# Altium PCB SLW_2018_V1.PcbDoc
Units mil, origin at the board's own origin, x right, y up, seen from the top; angles counter-clockwise.
Board outline 6000 x 4000 mil, 2 copper layers (Top Layer, Bottom Layer); 136 components, 146 nets, 765 pads, 0 vias.
Unrouted connection lines stored in the file: 452.
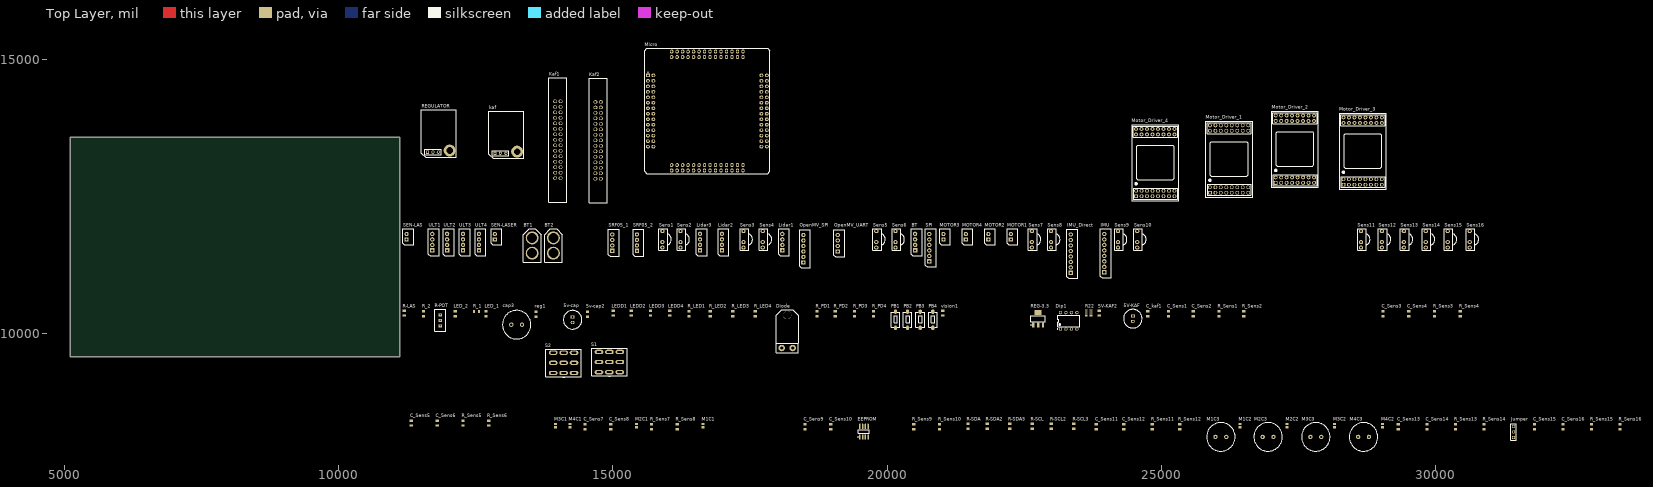
[diagram p0: Top Layer view]
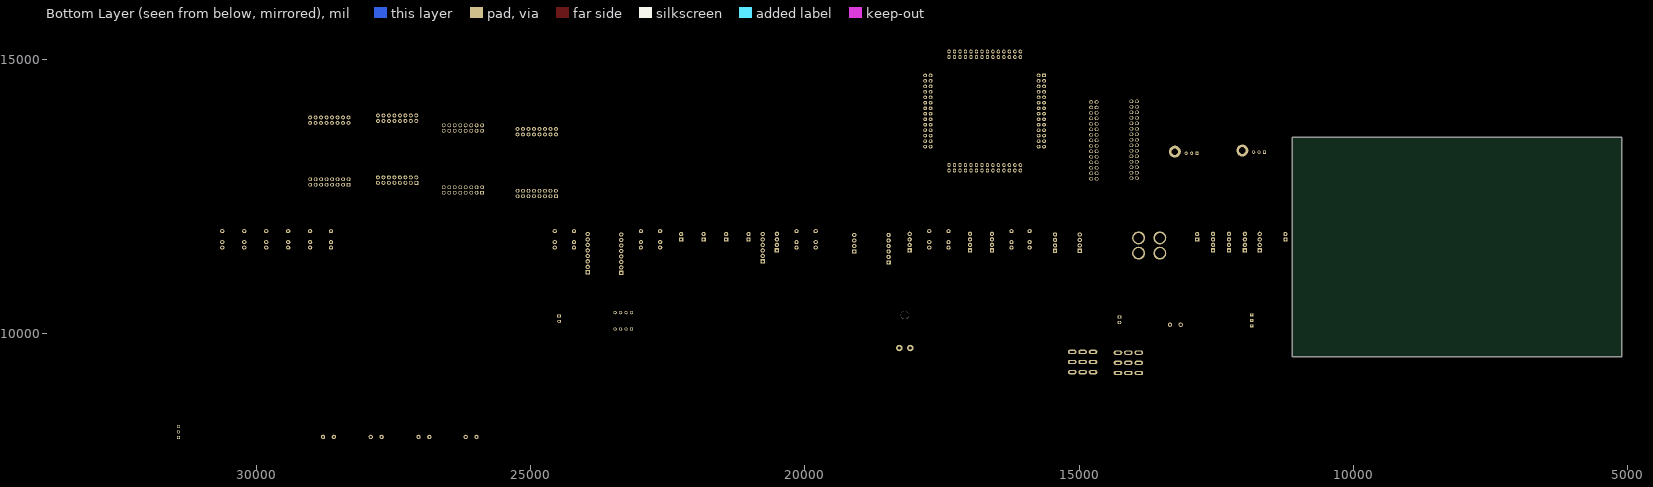
[diagram p1: Bottom Layer view, seen from below]

## Layer stack, top to bottom
Top Solder: solder mask 0.4, Solder Resist, Dk 3.5
Top Layer: signal copper 1.4
Dielectric 1: dielectric 12.6, FR-4, Dk 4.8
Bottom Layer: signal copper 1.4
Bottom Solder: solder mask 0.4, Solder Resist, Dk 3.5

## Board outline
5115,9575 11115,9575 11115,13575 5115,13575

## Design rules (kind name [scope] priority, off if disabled: settings)
Clearance [All] p1: gap=10
PolygonConnect [All] p1: connectstyle=Relief reliefconductorwidth=10 reliefentries=4 polygonreliefangle="90 Angle" airgapwidth=10
RoutingVias [All] p1: holewidth=28 width=50 viastyle="Through Hole" minholewidth=28 minwidth=50 maxholewidth=28 maxwidth=50
SolderMaskExpansion [All] p1: expansion=4
Width [All] p1: maxlimit=10 minlimit=10 preferedwidth=10
30 further rules are at their usual default settings.

## Components (designator, comment, footprint, x,y, rotation, side; value= is the part's Value field where it differs from the comment)
5v-cap "Cap" c100_63v 14270,10250 r0 top
5v-cap2 "Cap Semi" 805 14540,10350 r90 top
5V-KAF "Cap" c100_63v 24480,10270 r0 top
5V-KAF2 "Cap Semi" 805 23870,10370 r90 top
BT "Header 4" Round4 20540,11680 r90 top
BT1 "Battery" XT60 13695,11295 r90 top
BT2 "Battery" XT60 14080,11295 r90 top
C_kaf1 "Cap Semi" 805 24750,10360 r90 top
C_Sens1 "10uf" 805 25130,10360 r90 top
C_Sens2 "10uf" 805 25580,10360 r90 top
C_Sens3 "10uf" 805 29040,10360 r90 top
C_Sens4 "10uf" 805 29510,10360 r90 top
C_Sens5 "10uf" 805 11330,8365 r90 top
C_Sens6 "10uf" 805 11800,8365 r90 top
C_Sens7 "10uf" 805 14495,8295 r90 top
C_Sens8 "10uf" 805 14965,8295 r90 top
C_Sens9 "10uf" 805 18505,8295 r90 top
C_Sens10 "10uf" 805 18975,8295 r90 top
C_Sens11 "10uf" 805 23815,8295 r90 top
C_Sens12 "10uf" 805 24315,8295 r90 top
C_Sens13 "10uf" 805 29320,8295 r90 top
C_Sens14 "10uf" 805 29840,8295 r90 top
C_Sens15 "10uf" 805 31800,8295 r90 top
C_Sens16 "10uf" 805 32320,8295 r90 top
cap3 "Cap" C1000uf50v 13250,10160 r0 top
Diode "Diode 1N4007" STTA806 18180,10035 r0 top
Dip1 "dip switch 4" DIPsw4 23310,10230 r0 top
EEPROM "AT24C01BN-SP25-B" 8S1_M 19580,8210 r90 top
IMU "Header 8" Round8 23960,11115 r90 top
IMU_Direct "Header 8" Round8 23350,11105 r90 top
Jumper "Header 3" HDR1X3 31420,8105 r90 top
kaf "Header 3" LM2576 13055,13300 r0 top
Kaf1 "Header 15X2" PHL2X15 14000,13530 r90 top
Kaf2 "Header 15X2" PHL2X15 14735,13520 r90 top
LED_1 "LED Green 0603" 805 12690,10360 r90 top
LED_2 "LED Green 0805" 805 12130,10360 r90 top
LEDD1 "LED Green 0603" 805 15010,10370 r90 top
LEDD2 "LED Green 0603" 805 15340,10370 r90 top
LEDD3 "LED Green 0603" 805 15690,10370 r90 top
LEDD4 "LED Green 0603" 805 16040,10370 r90 top
Lidar1 "Header 4" Round4 18120,11680 r90 top
Lidar2 "Header 4" Round4 17020,11680 r90 top
Lidar3 "Header 4" Round4 16620,11680 r90 top
M1C1 "Cap Semi" C0805 16645,8320 r90 top
M1C2 "Cap Semi" C0805 26435,8320 r90 top
M1C3 "Cap Semi" C1000uf50v 26085,8115 r0 top
M2C1 "Cap Semi" C0805 15435,8320 r90 top
M2C2 "Cap Semi" C0805 27290,8320 r90 top
M2C3 "Cap Semi" C1000uf50v 26945,8115 r0 top
M3C1 "Cap Semi" C0805 13955,8320 r90 top
M3C2 "Cap Semi" C0805 28160,8320 r90 top
M3C3 "Cap Semi" C1000uf50v 27815,8115 r0 top
M4C1 "Cap Semi" C0805 14225,8320 r90 top
M4C2 "Cap Semi" C0805 29030,8320 r90 top
M4C3 "Cap Semi" C1000uf50v 28685,8115 r0 top
Micro "DB" DBPCB 16725,14055 r0 top
MOTOR1 "Motor" Round2 22355,11615 r90 top
MOTOR2 "Motor" Round2 21945,11615 r90 top
MOTOR3 "Motor" Round2 21125,11615 r90 top
MOTOR4 "Motor" Round2 21535,11615 r90 top
Motor_Driver_1 "Driver" Driver 26235,13180 r90 top
Motor_Driver_2 "Driver" Driver 27435,13360 r90 top
Motor_Driver_3 "Driver" Driver 28670,13325 r90 top
Motor_Driver_4 "Driver" Driver 24890,13115 r90 top
OpenMV_SPI "Header 6" Round6 18475,11295 r90 top
OpenMV_UART "Header 4" Round4 19130,11660 r90 top
PB1 "SW-PB" TactSMD 20155,10250 r90 top
PB2 "SW-PB" TactSMD 20375,10250 r90 top
PB3 "SW-PB" TactSMD 20605,10250 r90 top
PB4 "SW-PB" TactSMD 20835,10250 r90 top
R22 "10K" Res_Array 23675,10375 r0 top
R-LAS "Res1" 805 11200,10370 r90 top
R-POT "RPot" Multiturn 11855,10240 r90 top
R-SCL "Res1" 805 22645,8305 r90 top
R-SCL2 "Res1" 805 22995,8305 r90 top
R-SCL3 "Res1" 805 23405,8305 r90 top
R-SDA "Res1" 805 21475,8305 r90 top
R-SDA2 "Res1" 805 21825,8305 r90 top
R-SDA3 "Res1" 805 22235,8305 r90 top
R_1 "1K" 805 12515,10400 r0 top
R_2 "10K" 805 11550,10360 r90 top
R_LED1 "680 603" 805 16390,10360 r90 top
R_LED2 "680 603" 805 16780,10360 r90 top
R_LED3 "680 603" 805 17190,10360 r90 top
R_LED4 "680 603" 805 17600,10360 r90 top
R_PD1 "10K 603" 805 18725,10360 r90 top
R_PD2 "10K 603" 805 19055,10360 r90 top
R_PD3 "10K 603" 805 19405,10360 r90 top
R_PD4 "10K 603" 805 19755,10360 r90 top
R_Sens1 "100" 805 26050,10360 r90 top
R_Sens2 "100" 805 26500,10360 r90 top
R_Sens3 "100" 805 29980,10360 r90 top
R_Sens4 "100" 805 30450,10360 r90 top
R_Sens5 "100" 805 12270,8365 r90 top
R_Sens6 "100" 805 12740,8365 r90 top
R_Sens7 "100" 805 15705,8295 r90 top
R_Sens8 "100" 805 16175,8295 r90 top
R_Sens9 "100" 805 20485,8295 r90 top
R_Sens10 "100" 805 20955,8295 r90 top
R_Sens11 "100" 805 24835,8295 r90 top
R_Sens12 "100" 805 25335,8295 r90 top
R_Sens13 "100" 805 30360,8295 r90 top
R_Sens14 "100" 805 30880,8295 r90 top
R_Sens15 "100" 805 32840,8295 r90 top
R_Sens16 "100" 805 33360,8295 r90 top
reg1 "Cap" 805 13600,10350 r90 top
REG-3.3 "LM1117IMP-3.3" MP04A_N 22755,10270 r90 top
REGULATOR "Header 3" LM2576 11825,13320 r0 top
S1 "Toggle_Switch_3PDT" TS_3dpt 14940,9480 r180 top
S2 "Toggle_Switch_3PDT" TS_3dpt 14105,9465 r180 top
SEN-LAS "Header 2" Round2 11340,11615 r90 top
SEN-LASER "Header 2" Round2 12950,11615 r90 top
Sens1 "Header 3" TSOP 15905,11715 r90 top
Sens2 "Header 3" TSOP 16235,11715 r90 top
Sens3 "Header 3" TSOP 17385,11715 r90 top
Sens4 "Header 3" TSOP 17735,11715 r90 top
Sens5 "Header 3" TSOP 19805,11715 r90 top
Sens6 "Header 3" TSOP 20155,11715 r90 top
Sens7 "Header 3" TSOP 22640,11715 r90 top
Sens8 "Header 3" TSOP 22990,11715 r90 top
Sens9 "Header 3" TSOP 24210,11715 r90 top
Sens10 "Header 3" TSOP 24560,11715 r90 top
Sens11 "Header 3" TSOP 28640,11715 r90 top
Sens12 "Header 3" TSOP 29020,11715 r90 top
Sens13 "Header 3" TSOP 29420,11715 r90 top
Sens14 "Header 3" TSOP 29820,11715 r90 top
Sens15 "Header 3" TSOP 30220,11715 r90 top
Sens16 "Header 3" TSOP 30620,11715 r90 top
SPI "Header 6" Round6 20770,11315 r90 top
SRF05_1 "Header 4" Round4 15020,11670 r90 top
SRF05_2 "Header 4" Round4 15470,11670 r90 top
ULT1 "Header 4" Round4 11740,11680 r90 top
ULT2 "Header 4" Round4 12010,11680 r90 top
ULT3 "Header 4" Round4 12300,11680 r90 top
ULT4 "Header 4" Round4 12590,11680 r90 top
vision1 "Cap Semi" 805 21015,10370 r90 top

## Footprints (in the part's own frame and the unit in brackets; to place one, negate y for a bottom-side part, rotate by r counter-clockwise, add the part's x,y. Pads: shape width x height; smd on the part's side, far side on the other; paste and mask are expansions set on the pad)
8S1_M [mm] "SOIC, 8-Leads, Body 4.9x3.9mm, Pitch 1.27mm, IPC Low Density"
  oval 2.5x0.7 smd: 1(-2.45,1.905) 2(-2.45,0.635) 3(-2.45,-0.635) 4(-2.45,-1.905) 5(2.45,-1.905) 6(2.45,-0.635) 7(2.45,0.635) 8(2.45,1.905)
  silkscreen extent -2.57,-2.55 0.8,2.93, body extent -1.99,-2.52 1.99,2.52, height 1.75
805 [mm]
  rect 1.1x1.5 smd: 1(1.2,0) 2(-1.1,0)
  body extent -1,-0.7 1,0.7, height 0.6
c100_63v [mm]
  rect 1.824x1.5 hole 0.9: 1(0.016,1.27)
  oval 1.824x1.5 hole 0.9: 2(-0.016,-1.27)
  silkscreen extent -4.31,-4.3 4.28,4.3, body extent -4.3,-4.3 4.27,4.28, height 12.8
C0805 [mm] "Chip Capacitor, Body 2.0x1.3mm, IPC High Density"
  rect 1.1x1.4 smd: 1(-0.75,0) 2(0.75,0)
  body extent -1.1,-0.72 1.1,0.72, height 1.4
C1000uf50v [mm]
  round 2 hole 1: 1(-2.5,0) 2(2.5,0)
  silkscreen extent -6.6,-6.6 6.6,6.6, body extent -6.25,-6.25 6.25,6.25, height 25.5
DBPCB [mm]
  rect 1.8x1.524 hole 0.9: 1(-27.54,16.51)
  oval 1.8x1.524 hole 0.9: 2(-25,16.51) 3(-27.54,13.97) 4(-25,13.97) 5(-27.54,11.43) 6(-25,11.43) 7(-27.54,8.89) 8(-25,8.89) 9(-27.54,6.35) 10(-25,6.35) 11(-27.54,3.81) 12(-25,3.81) 13(-27.54,1.27) 14(-25,1.27) 15(-27.54,-1.27) 16(-25,-1.27) 17(-27.54,-3.81) 18(-25,-3.81) 19(-27.54,-6.35) 20(-25,-6.35) 21(-27.54,-8.89) 22(-25,-8.89) 23(-27.54,-11.43) 24(-25,-11.43) 25(-27.54,-13.97) 26(-25,-13.97) 27(-27.54,-16.51) 28(-25,-16.51) 57(27.54,-13.97) 58(25,-16.51) 59(27.54,-16.51) 60(25,-13.97) 61(27.54,-11.43) 62(25,-11.43) 63(27.54,-8.89) 64(25,-8.89) 65(27.54,-6.35) 66(25,-6.35) 67(27.54,-3.81) 68(25,-3.81) 69(27.54,-1.27) 70(25,-1.27) 71(27.54,1.27) 72(25,1.27) 73(27.54,3.81) 74(25,3.81) 75(27.54,6.35) 76(25,6.35) 77(27.54,8.89) 78(25,8.89) 79(27.54,11.43) 80(25,11.43) 81(27.54,13.97) 82(25,13.97) 83(27.54,16.51) 84(25,16.51)
  oval 1.524x1.8 hole 0.9: 29(-16.51,-27.54) 30(-16.51,-25) 31(-13.97,-27.54) 32(-13.97,-25) 33(-11.43,-27.54) 34(-11.43,-25) 35(-8.89,-27.54) 36(-8.89,-25) 37(-6.35,-27.54) 38(-6.35,-25) 39(-3.81,-27.54) 40(-3.81,-25) 41(-1.27,-27.54) 42(-1.27,-25) 43(1.27,-27.54) 44(1.27,-25) 45(3.81,-27.54) 46(3.81,-25) 47(6.35,-27.54) 48(6.35,-25) 49(8.89,-27.54) 50(8.89,-25) 51(11.43,-27.54) 52(11.43,-25) 53(13.97,-27.54) 54(13.97,-25) 55(16.51,-27.54) 56(16.51,-25) 85(16.51,27.54) 86(16.51,25) 87(13.97,27.54) 88(13.97,25) 89(11.43,27.54) 90(11.43,25) 91(8.89,27.54) 92(8.89,25) 93(6.35,27.54) 94(6.35,25) 95(3.81,27.54) 96(3.81,25) 97(1.27,27.54) 98(1.27,25) 99(-1.27,27.54) 100(-1.27,25) 101(-3.81,27.54) 102(-3.81,25) 103(-6.35,27.54) 104(-6.35,25) 105(-8.89,27.54) 106(-8.89,25) 107(-11.43,27.54) 108(-11.43,25) 109(-13.97,27.54) 110(-13.97,25) 111(-16.51,27.54) 112(-16.51,25)
  silkscreen extent -29,-29 29,29
DIPsw4 [mm]
  rect 1.5x1.5 hole 0.9: 1(-3.81,-3.81)
  round 1.5 hole 0.9: 2(-1.27,-3.81) 3(1.27,-3.81) 4(3.81,-3.81) 5(3.81,3.81) 6(1.27,3.81) 7(-1.27,3.81) 8(-3.81,3.81)
  silkscreen extent -5.23,-3.93 5.15,2.65, body extent -6.14,-4.9 6.2,4.88, height 8.14
Driver [mm]
  rect 1.8x1.8 hole 1: 1(-15.596,8.915)
  round 1.8 hole 1: 1(-13.056,8.915) 2(-15.596,6.375) 2(-13.056,6.375) 3(-15.596,3.835) 3(-13.056,3.835) 4(-15.596,1.295) 4(-13.056,1.295) 5(-15.596,-1.245) 5(-13.056,-1.245) 6(-15.596,-3.785) 6(-13.056,-3.785) 7(-15.596,-6.325) 7(-13.056,-6.325) 8(-15.596,-8.865) 8(-13.056,-8.865) 9(13.056,-8.865) 9(13.056,-6.325) 9(15.596,-8.865) 9(15.596,-6.325) 10(13.056,3.835) 10(13.056,-3.785) 10(15.596,-3.785) 10(15.596,3.835) 11(13.056,-1.245) 11(13.056,1.295) 11(15.596,-1.245) 11(15.596,1.295) 12(13.056,6.375) 12(13.056,8.915) 12(15.596,8.915) 12(15.596,6.375)
  silkscreen extent -17.68,-10.9 17.58,10.95
HDR1X3 [mm] "Connector; Header; 3 Position"
  rect 1.5x1.5 hole 0.9: 1(0,0)
  round 1.5 hole 0.9: 2(2.54,0) 3(5.08,0)
  silkscreen extent -1.27,-1.27 6.35,1.27
LM2576 [mm]
  round 5.5 hole 3.1: 0(5.143,0.381)
  round 1.5 hole 0.9: 1(-2.603,-0.381) 3(-0.064,-0.381)
  rect 1.5x1.5 hole 0.9: 2(-5.143,-0.381)
  silkscreen extent -7.87,-2.79 8.19,19.18
MP04A_N [mm] "SOT223, 4-Leads, Body 6.5x3.5mm, Pitch 2.3mm, Lead Span 7mm, IPC Medium Density"
  rect 2.4x1 smd: 1(-2.9,2.3) 2(-2.9,0) 3(-2.9,-2.3)
  rect 2.4x3.3 smd: 4(2.9,0)
  silkscreen extent -3.02,-3.35 1.4,3.47, body extent -1.86,-3.35 1.86,3.35, height 1.8
Multiturn [mm]
  rect 1.4x1.5 hole 0.8: 1(-2.54,0) 2(2.54,0) 3(0,0)
  silkscreen extent -5.08,-2.54 5.08,2.54, body extent -4.76,-2.4 4.77,2.4, height 11.55
PHL2X15 [mm]
  oval 1.6x1.8 hole 1.1: 1(-17.78,1.27) 2(-17.78,-1.27) 3(-15.24,1.27) 4(-15.24,-1.27) 5(-12.7,1.27) 6(-12.7,-1.27) 7(-10.16,1.27) 8(-10.16,-1.27) 9(-7.62,1.27) 10(-7.62,-1.27) 11(-5.08,1.27) 12(-5.08,-1.27) 13(-2.54,1.27) 14(-2.54,-1.27) 15(0,1.27) 16(0,-1.27) 17(2.54,1.27) 18(2.54,-1.27) 19(5.08,1.27) 20(5.08,-1.27) 21(7.62,1.27) 22(7.62,-1.27) 23(10.16,1.27) 24(10.16,-1.27) 25(12.7,1.27) 26(12.7,-1.27) 27(15.24,1.27) 28(15.24,-1.27) 29(17.78,1.27) 30(17.78,-1.27)
  silkscreen extent -28.81,-4.2 28.81,4.2
Res_Array [mm]
  rect 1.2x0.5 smd: 1(-1.1,-1.333) 2(-1.1,-0.444) 3(-1.1,0.445) 4(-1.1,1.334) 5(1.1,1.334) 6(1.1,0.445) 7(1.1,-0.444) 8(1.1,-1.333)
  body extent -0.8,-1.6 0.8,1.6, height 0.51
Round2 [mm]
  rect 2x2 hole 1: 1(2.488,2.47)
  round 2 hole 1: 2(5.028,2.47)
  silkscreen extent 0,-0.76 7.5,4.24
Round4 [mm]
  rect 2x2 hole 1: 1(-4.182,0.715)
  round 2 hole 1: 2(-1.642,0.715) 3(0.903,0.715) 4(3.447,0.719)
  silkscreen extent -6.67,-2.52 5.92,2.48
Round6 [mm]
  rect 2x2 hole 1: 1(-0.004,-0.009)
  round 2 hole 1: 2(2.536,-0.009) 3(5.076,-0.009) 4(7.616,-0.009) 5(10.156,-0.009) 6(12.696,-0.009)
  silkscreen extent -2.49,-3.24 15.18,1.76
Round8 [mm]
  rect 2x2 hole 1: 1(-0.004,0.004)
  round 2 hole 1: 2(2.536,0.004) 3(5.076,0.004) 4(7.616,0.004) 5(10.156,0.004) 6(12.696,0.004) 7(15.236,0.004) 8(17.776,0.004)
  silkscreen extent -2.49,-3.23 20.26,1.77
STTA806 [mm]
  round 3 hole 1.5: 1(2.54,-7.62) 2(-2.54,-7.62)
  round 3.81 hole 3.81: 6(0,7.62)
  silkscreen extent -5.08,-9.91 5.08,10.16
TactSMD [mm]
  oct 2x1.5 smd: 1(3.75,0) 2(-3.75,0)
  silkscreen extent -3.45,-2 3.45,2, body extent -4,-1.8 4,1.8, height 2.4
TS_3dpt [mm]
  round 1 hole 1: 1(-5.58,-4.7) 1(-5.338,-4.7) 1(-5.08,-4.7) 1(-4.58,-4.7) 1(-4.322,-4.7) 1(-4.08,-4.7) 2(-5.58,0) 2(-5.338,0) 2(-5.08,0) 2(-4.58,0) 2(-4.322,0) 2(-4.08,0) 3(-5.58,4.7) 3(-5.338,4.7) 3(-5.08,4.7) 3(-4.58,4.7) 3(-4.322,4.7) 3(-4.08,4.7) 4(-0.75,-4.7) 4(-0.508,-4.7) 4(-0.25,-4.7) 4(0.25,-4.7) 4(0.508,-4.7) 4(0.75,-4.7) 5(-0.75,0) 5(-0.508,0) 5(-0.25,0) 5(0.25,0) 5(0.508,0) 5(0.75,0) 6(-0.75,4.7) 6(-0.508,4.7) 6(-0.25,4.7) 6(0.25,4.7) 6(0.508,4.7) 6(0.75,4.7) 7(4.08,-4.7) 7(4.322,-4.7) 7(4.58,-4.7) 7(5.08,-4.7) 7(5.338,-4.7) 7(5.58,-4.7) 8(4.08,0) 8(4.322,0) 8(4.58,0) 8(5.08,0) 8(5.338,0) 8(5.58,0) 9(4.08,4.7) 9(4.322,4.7) 9(4.58,4.7) 9(5.08,4.7) 9(5.338,4.7) 9(5.58,4.7)
  oval 4x2 hole 1: 1(-4.83,-4.7) 2(-4.83,0) 3(-4.83,4.7) 4(0,-4.7) 5(0,0) 6(0,4.7) 7(4.83,-4.7) 8(4.83,0) 9(4.83,4.7)
  silkscreen extent -8.25,-6.35 8.26,6.6, body extent -8.75,-6.5 8.75,6.9, height 31.04
TSOP [mm]
  oval 1.8x2 hole 1: 1(-3.81,0) 2(-1.27,0) 3(3.81,0)
  silkscreen extent -5,-4.15 5,1.6
XT60 [mm]
  round 6 hole 4.6: 1(4.28,4.12) 2(11.38,4.12)
  silkscreen extent 0,0 15.7,8.2

## Part data
5v-cap 5V-KAF cap3 reg1: "Capacitor"
5v-cap2 5V-KAF2 C_kaf1 M1C1 M1C2 M1C3 M2C1 M2C2 M2C3 M3C1 M3C2 M3C3 M4C1 M4C2 M4C3 vision1: "Capacitor (Semiconductor SIM Model)"
BT Lidar1 Lidar2 Lidar3 OpenMV_UART SRF05_1 SRF05_2 ULT1 ULT2 ULT3 ULT4: "Header, 4-Pin"
BT1 BT2: "Multicell Battery"
C_Sens1 C_Sens2 C_Sens3 C_Sens4 C_Sens5 C_Sens6 C_Sens7 C_Sens8 C_Sens9 C_Sens10 C_Sens11 C_Sens12 C_Sens13 C_Sens14 C_Sens15 C_Sens16: library part Cap, "Capacitor"
Diode: "1 Amp General Purpose Rectifier"
Dip1: library part SW-DIP4, "DIP Switch"
EEPROM: "1Kbit (128 x 8), 2-wire Bus Automotive Serial EEPROM with Write Protect, 2.5V, 8-Pin SOIC, Bulk"
IMU IMU_Direct: "Header, 8-Pin"
Jumper kaf REGULATOR Sens1 Sens2 Sens3 Sens4 Sens5 Sens6 Sens7 Sens8 Sens9 Sens10 Sens11 Sens12 Sens13 Sens14 Sens15 Sens16: "Header, 3-Pin"
Kaf1 Kaf2: "Header, 15-Pin, Dual row"
LED_1 LED_2 LEDD1 LEDD2 LEDD3 LEDD4: library part LED0, "Typical INFRARED GaAs LED"
MOTOR1 MOTOR2 MOTOR3 MOTOR4: "Motor, General Kind"
OpenMV_SPI SPI: "Header, 6-Pin"
PB1 PB2 PB3 PB4: "Switch"
R22: library part "Res Array 4"
R-LAS R-SCL R-SCL2 R-SCL3 R-SDA R-SDA2 R-SDA3: "Resistor"
R-POT: "Potentiometer"
R_1 R_2 R_LED1 R_LED2 R_LED3 R_LED4 R_PD1 R_PD2 R_PD3 R_PD4: library part res1, "Resistor"
R_Sens1 R_Sens2 R_Sens3 R_Sens4 R_Sens5 R_Sens6 R_Sens7 R_Sens8 R_Sens9 R_Sens10 R_Sens11 R_Sens12 R_Sens13 R_Sens14 R_Sens15 R_Sens16: library part Res1, "Resistor"
REG-3.3: "800mA Low-Dropout Linear Regulator, 4-pin SOT-223"
SEN-LAS SEN-LASER: "Header, 2-Pin"

## Nets (pads, with @x,y where several pads share a name; then routed paths per layer and width w, separated by ;. In a path a pad name is that pad's centre, name@x,y a point inside that pad or via, vN(x,y) a via of type N, cw(c..) or ccw(c..) an arc to the next point about the centre after c; other vN are vias at no path point)
3.3V: Dip1.5 Dip1.6 Dip1.7 Dip1.8 EEPROM.8 Jumper.1 Kaf1.4 Kaf2.4 PB1.2 PB2.2 PB3.2 PB4.2 REG-3.3.2 REG-3.3.4 SEN-LAS.1
5V_IN: C_kaf1.2 kaf.1 reg1.1 REGULATOR.1 S2.3 S2.6 S2.9 vision1.2
BATT1: BT1.1 BT2.2
BATT2: BT2.1 Diode.1 S1.2 S1.4 S1.8
DIP1: Dip1.4 Micro.98 R22.1
DIP2: Dip1.3 Micro.99 R22.2
DIP3: Dip1.2 Micro.100 R22.3
DIP4: Dip1.1 Micro.101 R22.4
ECHO1: SRF05_1.3
ECHO2: SRF05_2.3
GND: 5v-cap2.1 5v-cap.1 5V-KAF2.1 5V-KAF.1 BT1.2 BT.4 C_kaf1.1 C_Sens1.1 C_Sens2.1 C_Sens3.1 C_Sens4.1 C_Sens5.1 C_Sens6.1 C_Sens7.1 C_Sens8.1 C_Sens9.1 C_Sens10.1 C_Sens11.1 C_Sens12.1 C_Sens13.1 C_Sens14.1 C_Sens15.1 C_Sens16.1 cap3.1 EEPROM.1 EEPROM.2 EEPROM.3 EEPROM.4 EEPROM.7 IMU.4 IMU_Direct.2 Kaf1.2 Kaf2.2 kaf.2 LED_1.2 LED_2.2 LEDD1.2 LEDD2.2 LEDD3.2 LEDD4.2 Lidar1.4 Lidar2.4 Lidar3.4 M1C2.1 M1C3.1 M2C2.1 M2C3.1 M3C2.1 M3C3.1 M4C2.1 M4C3.1 Micro.16 Motor_Driver_1.2 Motor_Driver_1.10 Motor_Driver_2.2 Motor_Driver_2.10 Motor_Driver_3.2 Motor_Driver_3.10 Motor_Driver_4.10 OpenMV_SPI.6 OpenMV_UART.4 R22.5 R22.6 R22.7 R22.8 R-LAS.2 R-POT.2 R_PD1.2 R_PD2.2 R_PD3.2 R_PD4.2 reg1.2 REG-3.3.1 REGULATOR.2 Sens1.1 Sens2.1 Sens3.1 Sens4.1 Sens5.1 Sens6.1 Sens7.1 Sens8.1 Sens9.1 Sens10.1 Sens11.1 Sens12.1 Sens13.1 Sens14.1 Sens15.1 Sens16.1 SPI.6 SRF05_1.4 SRF05_2.4 ULT1.4 ULT2.4 ULT3.4 ULT4.4 vision1.1
I2C1_SCL: Micro.107 R-SCL.1 ULT1.3 ULT2.3 ULT3.3 ULT4.3
I2C1_SDA: Micro.108 R-SDA.1 ULT1.2 ULT2.2 ULT3.2 ULT4.2
I2C2_SCL: EEPROM.6 Micro.11 R-SCL2.1
I2C2_SDA: EEPROM.5 Micro.10 R-SDA2.1
I2C3_SCL: IMU_Direct.3 Micro.80 R-SCL3.1
I2C3_SDA: IMU_Direct.4 Micro.79 R-SDA3.1
KICK: Micro.97
LASER: Micro.78 R-POT.1 R-POT.3 SEN-LASER.2
LDR1: Kaf1.8 Micro.22
LDR2: Kaf1.10 Micro.23
LDR3: Kaf1.12 Micro.24
LDR4: Kaf1.14 Micro.25
LDR5: Kaf1.16 Micro.26
LDR6: Kaf1.18 Micro.27
LDR7: Kaf1.20 Micro.28
LDR8: Kaf1.22 Micro.29
LDR9: Kaf1.7 Micro.30
LDR10: Kaf1.9 Micro.31
LDR11: Kaf1.11 Micro.32
LDR12: Kaf1.13 Micro.33
LDR13: Kaf1.15 Micro.34
LDR14: Kaf1.17 Micro.35
LDR15: Kaf1.19 Micro.36
LDR16: Kaf1.21 Micro.37
LED1: Micro.42 R_LED1.1
LED2: Micro.41 R_LED2.1
LED3: Micro.40 R_LED3.1
LED4: Micro.39 R_LED4.1
MOTOR1_1: Micro.54 Motor_Driver_1.3
MOTOR1_2: Micro.51 Motor_Driver_1.8
MOTOR1_OUT1: Kaf1.23 Kaf1.24 M1C1.2 MOTOR1.2 Motor_Driver_1.12
MOTOR1_OUT2: Kaf1.25 Kaf1.26 M1C1.1 MOTOR1.1 Motor_Driver_1.9
MOTOR1_PWM: Micro.48 Motor_Driver_1.5
MOTOR2_1: Micro.49 Motor_Driver_2.3
MOTOR2_2: Micro.47 Motor_Driver_2.8
MOTOR2_OUT1: Kaf1.27 Kaf1.28 M2C1.2 MOTOR2.2 Motor_Driver_2.12
MOTOR2_OUT2: Kaf1.29 Kaf1.30 M2C1.1 MOTOR2.1 Motor_Driver_2.9
MOTOR2_PWM: Micro.50 Motor_Driver_2.5
MOTOR3_1: Micro.46 Motor_Driver_3.3
MOTOR3_2: Micro.45 Motor_Driver_3.8
MOTOR3_OUT1: Kaf2.27 Kaf2.28 M3C1.2 MOTOR3.2 Motor_Driver_3.12
MOTOR3_OUT2: Kaf2.29 Kaf2.30 M3C1.1 MOTOR3.1 Motor_Driver_3.9
MOTOR3_PWM: Micro.52 Motor_Driver_3.5
MOTOR4_1: Micro.44 Motor_Driver_4.3
MOTOR4_2: Micro.43 Motor_Driver_4.8
MOTOR4_OUT1: Kaf2.23 Kaf2.24 M4C1.2 MOTOR4.2 Motor_Driver_4.12
MOTOR4_OUT2: Kaf2.25 Kaf2.26 M4C1.1 MOTOR4.1 Motor_Driver_4.9
MOTOR4_PWM: Micro.53 Motor_Driver_4.5
NetC_Sens1_2: C_Sens1.2 R_Sens1.1 Sens1.2
NetC_Sens2_2: C_Sens2.2 R_Sens2.1 Sens2.2
NetC_Sens3_2: C_Sens3.2 R_Sens3.1 Sens3.2
NetC_Sens4_2: C_Sens4.2 R_Sens4.1 Sens4.2
NetC_Sens5_2: C_Sens5.2 R_Sens5.1 Sens5.2
NetC_Sens6_2: C_Sens6.2 R_Sens6.1 Sens6.2
NetC_Sens7_2: C_Sens7.2 R_Sens7.1 Sens7.2
NetC_Sens8_2: C_Sens8.2 R_Sens8.1 Sens8.2
NetC_Sens9_2: C_Sens9.2 R_Sens9.1 Sens9.2
NetC_Sens10_2: C_Sens10.2 R_Sens10.1 Sens10.2
NetC_Sens11_2: C_Sens11.2 R_Sens11.1 Sens11.2
NetC_Sens12_2: C_Sens12.2 R_Sens12.1 Sens12.2
NetC_Sens13_2: C_Sens13.2 R_Sens13.1 Sens13.2
NetC_Sens14_2: C_Sens14.2 R_Sens14.1 Sens14.2
NetC_Sens15_2: C_Sens15.2 R_Sens15.1 Sens15.2
NetC_Sens16_2: C_Sens16.2 R_Sens16.1 Sens16.2
NetDiode_2: Diode.2 S2.2 S2.4 S2.8
NetLED_1_1: LED_1.1 R_1.1
NetLED_2_1: LED_2.1 R_2.1
NetLEDD1_1: LEDD1.1 R_LED1.2
NetLEDD2_1: LEDD2.1 R_LED2.2
NetLEDD3_1: LEDD3.1 R_LED3.2
NetLEDD4_1: LEDD4.1 R_LED4.2
NetR-LAS_1: R-LAS.1 SEN-LAS.2
PB1: Micro.109 PB1.1 R_PD1.1
PB2: Micro.110 PB2.1 R_PD2.1
PB3: Micro.111 PB3.1 R_PD3.1
PB4: Micro.112 PB4.1 R_PD4.1
RX1U_TXM: IMU.3 Micro.82 Micro.95 OpenMV_UART.3
RX3U_TXM: BT.3 Micro.56
RX4U_TXM: Lidar1.3 Micro.87
RX5U_TXM: Lidar2.3 Micro.91
RX6U_TXM: Lidar3.3 Micro.77
SENS1: Micro.21 Sens1.3
SENS2: Micro.20 Sens2.3
SENS3: Micro.19 Sens3.3
SENS4: Micro.18 Sens4.3
SENS5: Micro.17 Sens5.3
SENS6: Micro.15 Sens6.3
SENS7: Micro.14 Sens7.3
SENS8: Micro.13 Sens8.3
SENS9: Micro.12 Sens9.3
SENS10: Micro.9 Sens10.3
SENS11: Micro.8 Sens11.3
SENS12: Micro.7 Sens12.3
SENS13: Micro.5 Sens13.3
SENS14: Micro.4 Sens14.3
SENS15: Micro.3 Sens15.3
SENS16: Micro.2 Sens16.3
SPI1_MISO: Micro.105 OpenMV_SPI.2
SPI1_MOSI: Micro.106 OpenMV_SPI.3
SPI1_SCK: Micro.104 OpenMV_SPI.4
SPI1_SS: Micro.103 OpenMV_SPI.5
SPI2_MISO: Micro.59 SPI.2
SPI2_MOSI: Micro.60 SPI.3
SPI2_SCK: Micro.55 SPI.4
SPI2_SS: Micro.58 SPI.5
SPIN: Micro.96
TEMT0: Micro.89
TEMT1: Kaf2.8 Micro.90
TEMT2: Kaf2.10 Micro.69
TEMT3: Kaf2.12 Micro.70
TEMT4: Kaf2.14 Micro.71
TEMT5: Kaf2.16 Micro.72
TEMT6: Kaf2.18 Micro.73
TEMT7: Kaf2.20 Micro.74
TEMT8: Kaf2.22 Micro.75
TEMT9: Kaf2.7 Micro.62
TEMT10: Kaf2.9 Micro.63
TEMT11: Kaf2.11 Micro.64
TEMT12: Kaf2.13 Micro.65
TEMT13: Kaf2.15 Micro.66
TEMT14: Kaf2.17 Micro.67
TEMT15: Kaf2.19 Micro.68
TEMT16: Kaf2.21
TRIG1: SRF05_1.2
TRIG2: SRF05_2.2
TSOP_JUMPER: Jumper.2 R_Sens1.2 R_Sens2.2 R_Sens3.2 R_Sens4.2 R_Sens5.2 R_Sens6.2 R_Sens7.2 R_Sens8.2 R_Sens9.2 R_Sens10.2 R_Sens11.2 R_Sens12.2 R_Sens13.2 R_Sens14.2 R_Sens15.2 R_Sens16.2
TX1U_RXM: IMU.2 Micro.81
TX2U_RXM: Micro.94 OpenMV_UART.2
TX3U_RXM: BT.2 Micro.61
TX4U_RXM: Lidar1.2 Micro.86
TX5U_RXM: Lidar2.2 Micro.88
TX6U_RXM: Lidar3.2 Micro.76
VCC: 5v-cap2.2 5v-cap.2 BT.1 IMU.1 IMU_Direct.1 Jumper.3 Lidar1.1 Lidar2.1 Lidar3.1 Micro.6 Motor_Driver_1.1 Motor_Driver_2.1 Motor_Driver_3.1 Motor_Driver_4.1 OpenMV_SPI.1 OpenMV_UART.1 R-SCL2.2 R-SCL3.2 R-SCL.2 R-SDA2.2 R-SDA3.2 R-SDA.2 R_1.2 REG-3.3.3 REGULATOR.3 SEN-LASER.1 SPI.1 SRF05_1.1 SRF05_2.1 ULT1.1 ULT2.1 ULT3.1 ULT4.1
VCC-KAF: 5V-KAF2.2 5V-KAF.2 Kaf1.1 Kaf2.1 kaf.3
VS: M1C2.2 M1C3.2 M2C2.2 M2C3.2 M3C2.2 M3C3.2 M4C2.2 M4C3.2 Motor_Driver_1.11 Motor_Driver_2.11 Motor_Driver_3.11 Motor_Driver_4.11 R_2.2 S1.3 S1.6 S1.9
pads on no net: cap3.2 Diode.6 IMU.5 IMU.6 IMU.7 IMU.8 IMU_Direct.5 IMU_Direct.6 IMU_Direct.7 IMU_Direct.8 Kaf1.3 Kaf1.5 Kaf1.6 Kaf2.3 Kaf2.5 Kaf2.6 kaf.0 Micro.1 Micro.38 Micro.57 Micro.83 Micro.84 Micro.85 Micro.92 Micro.93 Micro.102 Motor_Driver_1.4 Motor_Driver_1.6 Motor_Driver_1.7 Motor_Driver_2.4 Motor_Driver_2.6 Motor_Driver_2.7 Motor_Driver_3.4 Motor_Driver_3.6 Motor_Driver_3.7 Motor_Driver_4.2 Motor_Driver_4.4 Motor_Driver_4.6 Motor_Driver_4.7 REGULATOR.0 S1.1 S1.5 S1.7 S2.1 S2.5 S2.7